# Altium PCB SNES TST Adapter GPM RGB APU.PcbDoc
Units mm, origin at the board's own origin, x right, y up, seen from the top; angles counter-clockwise.
Board outline 18.8 x 25 mm, 4 copper layers (Top Layer, Signal Layer 1, Signal Layer 2, Bottom Layer), stack 0.778 mm thick; 2 components, 68 nets, 280 pads, 150 vias.
Unrouted connection lines stored in the file: 3.
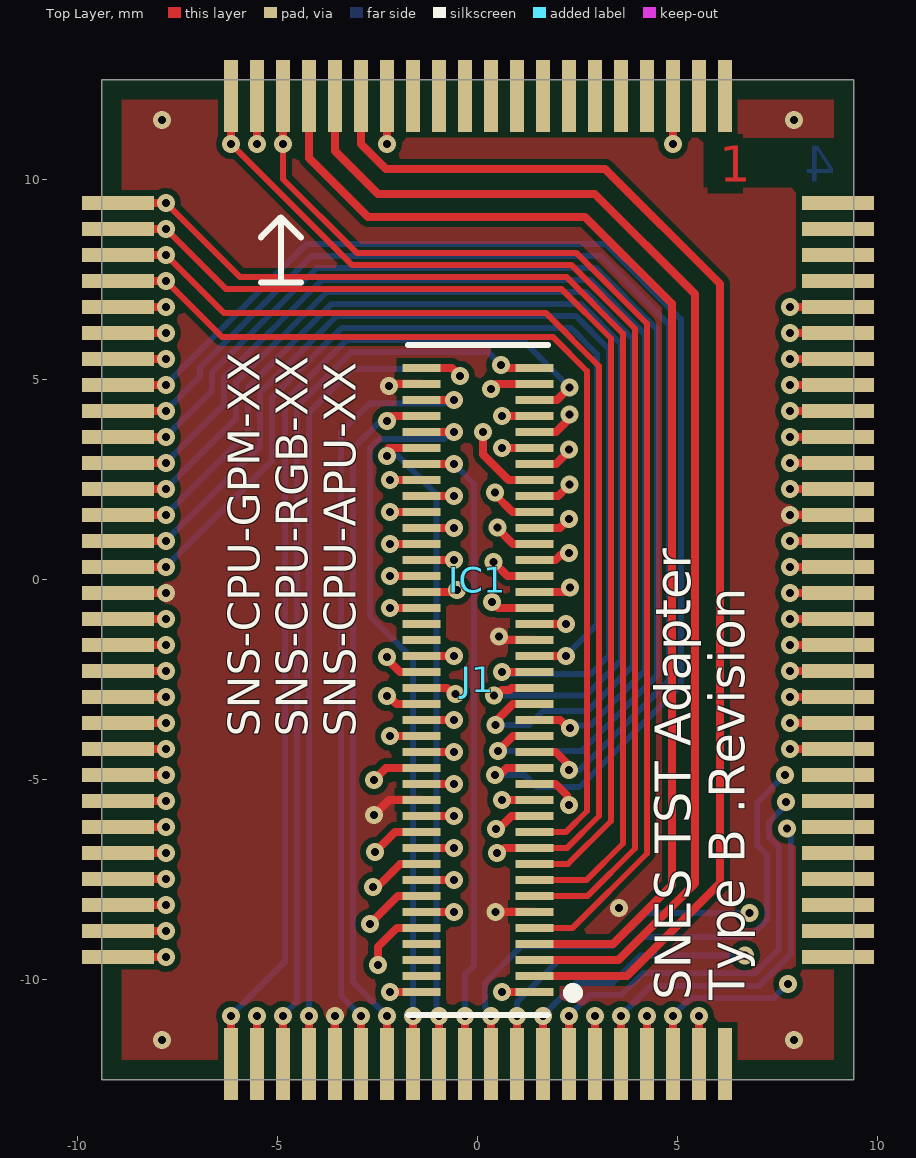
[diagram p0: Top Layer view]
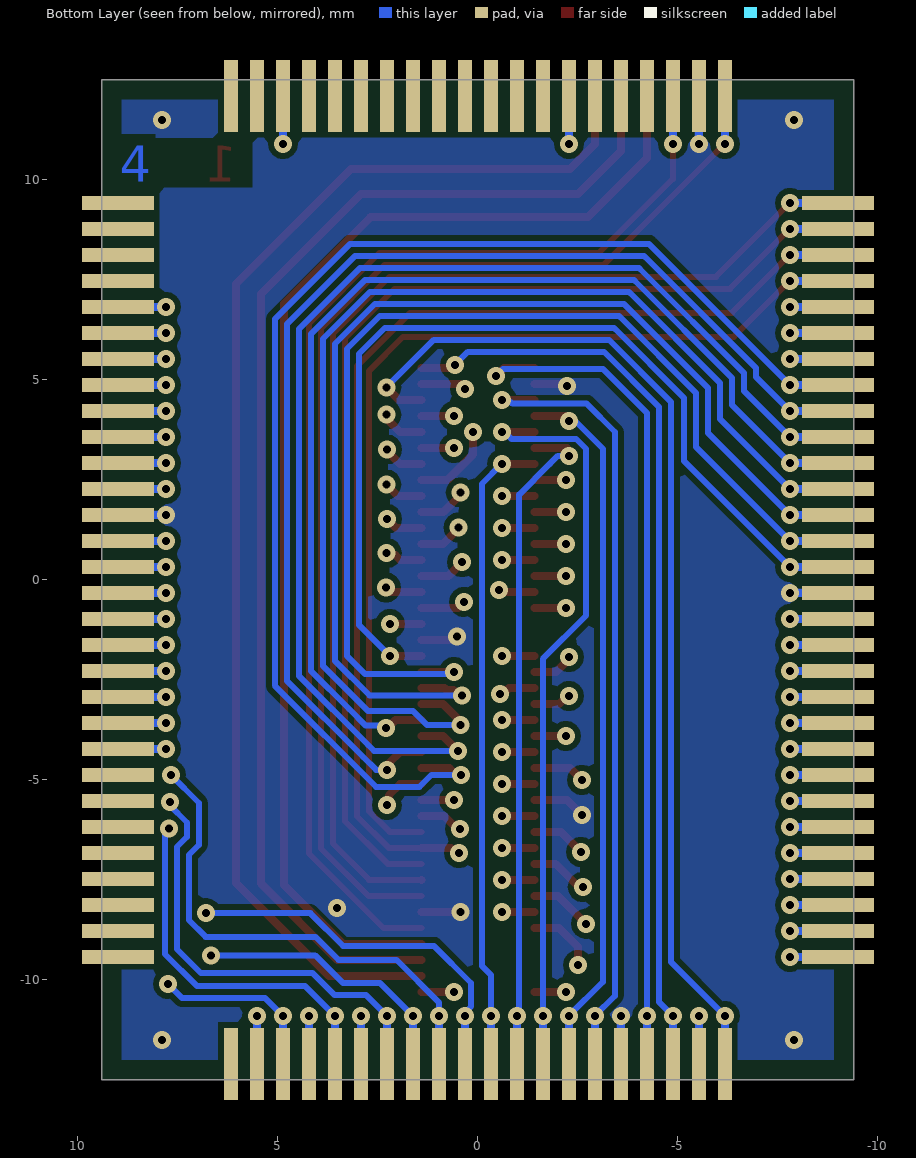
[diagram p1: Bottom Layer view, seen from below]
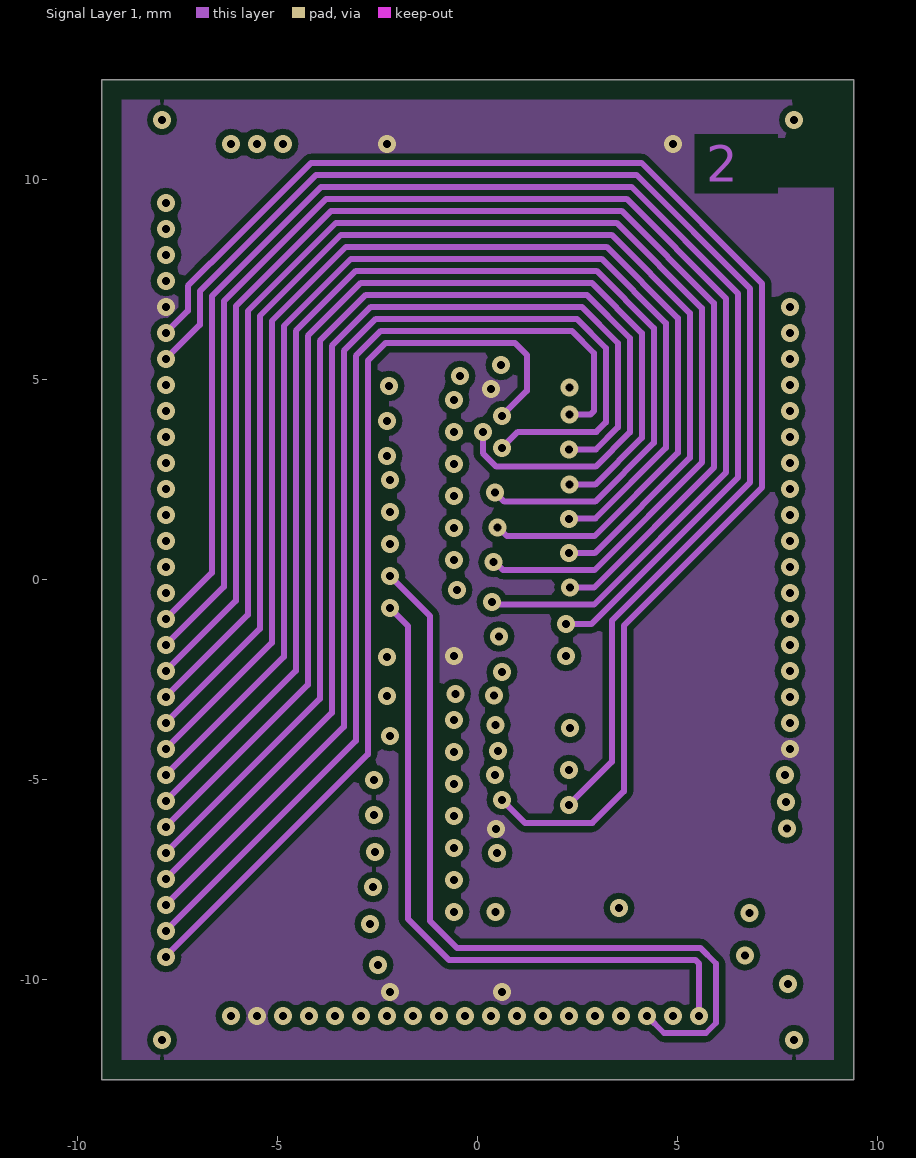
[diagram p2: Signal Layer 1]
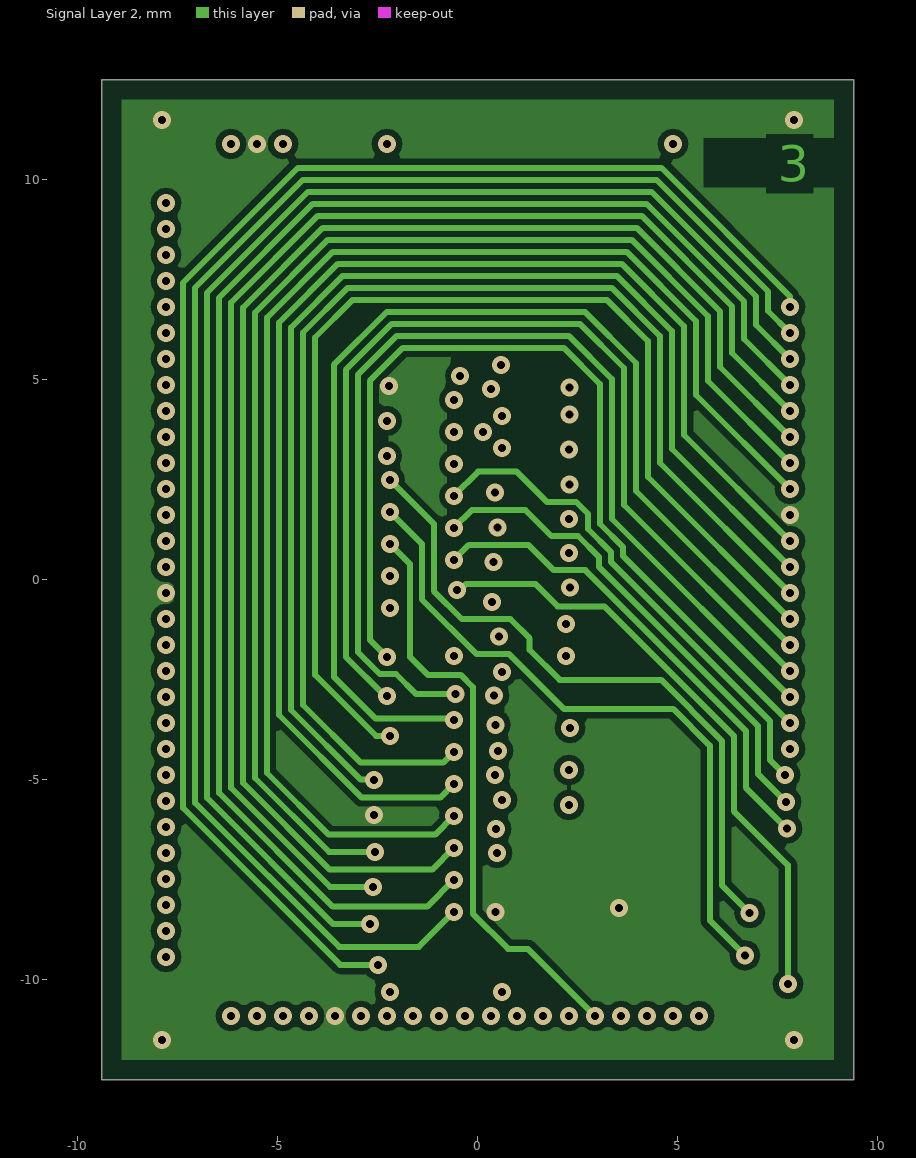
[diagram p3: Signal Layer 2]

## Layer stack, top to bottom
Top Solder: solder mask 0.0102, Solder Resist, Dk 3.5
Top Layer: signal copper 0.0356
Dielectric 1: core 0.254, FR-4, Dk 4.2
Signal Layer 1: signal copper 0.036
Dielectric 3: prepreg 0.127, Dk 4.2
Signal Layer 2: signal copper 0.036
Dielectric 2: core 0.254, Dk 4.2
Bottom Layer: signal copper 0.0356
Bottom Solder: solder mask 0.0102, Solder Resist, Dk 3.5

## Board outline
-9.4,-12.5 9.4,-12.5 9.4,12.5 -9.4,12.5

## Design rules (kind name [scope] priority, off if disabled: settings)
BoardOutlineClearance [All] p1: gap=0 ignorepadtopadclearanceinfootprint=FALSE except(0.25: Track-OutlineEdge Track-CavityEdge Track-CutoutEdge Track-SplitBarrior; 0.3: Poly-OutlineEdge Poly-CavityEdge Poly-CutoutEdge Poly-SplitBarrior)
Clearance [All] p1: gap=0.15 ignorepadtopadclearanceinfootprint=FALSE except(0: Arc-Hole Track-Hole SMDPad-Hole THPad-Hole Via-Hole Fill-Hole Poly-Hole Region-Hole Text-Hole; 0.127: Arc-Via Track-Via)
MinimumSolderMaskSliver [All] p1: minsoldermaskwidth=0.099
PolygonConnect PolygonConnect_Via [isVia] p1: connectstyle=Direct reliefconductorwidth=0.254 reliefentries=4 polygonreliefangle="90 Angle" airgapwidth=0.254
PolygonConnect [All] p2: connectstyle=Relief reliefconductorwidth=0.2 reliefentries=4 polygonreliefangle="90 Angle" airgapwidth=0.2
RoutingVias [All] p1: holewidth=0.711 width=1.27 viastyle="Through Hole" minholewidth=0.2 minwidth=0.35 maxholewidth=0.711 maxwidth=1.27
SilkToSilkClearance [All] p1: silktosilkclearance=0.1
SilkToSolderMaskClearance [IsPad] p1: minsilkscreentomaskgap=0.1 clearancetoexposedcopper=TRUE
SolderMaskExpansion [All] p1: expansion=0.05 istentingtop=FALSE
UnRoutedNet [Not InNet('5V_S')] p1 off:
Width [All] p1: maxlimit=0.75 minlimit=0.15 preferedwidth=0.2
26 further rules are at their usual default settings.

## Components (designator, comment, footprint, x,y, rotation, side; value= is the part's Value field where it differs from the comment)
IC1 "PPU2100Pin" PPU100Pin_Double 0,0 r0 top locked
J1 "Conn 80P" DF40C-80DS 0,-2.5 r90 top locked

## Footprints (in the part's own frame and the unit in brackets; to place one, negate y for a bottom-side part, rotate by r counter-clockwise, add the part's x,y. Pads: shape width x height; smd on the part's side, far side on the other; paste and mask are expansions set on the pad)
DF40C-80DS [mm]
  rect 0.2x0.95 smd: 1(-7.8,-1.415) 2(-7.8,1.415) 3(-7.4,-1.415) 4(-7.4,1.415) 5(-7,-1.415) 6(-7,1.415) 7(-6.6,-1.415) 8(-6.6,1.415) 9(-6.2,-1.415) 10(-6.2,1.415) 11(-5.8,-1.415) 12(-5.8,1.415) 13(-5.4,-1.415) 14(-5.4,1.415) 15(-5,-1.415) 16(-5,1.415) 17(-4.6,-1.415) 18(-4.6,1.415) 19(-4.2,-1.415) 20(-4.2,1.415) 21(-3.8,-1.415) 22(-3.8,1.415) 23(-3.4,-1.415) 24(-3.4,1.415) 25(-3,-1.415) 26(-3,1.415) 27(-2.6,-1.415) 28(-2.6,1.415) 29(-2.2,-1.415) 30(-2.2,1.415) 31(-1.8,-1.415) 32(-1.8,1.415) 33(-1.4,-1.415) 34(-1.4,1.415) 35(-1,-1.415) 36(-1,1.415) 37(-0.6,-1.415) 38(-0.6,1.415) 39(-0.2,-1.415) 40(-0.2,1.415) 41(0.2,-1.415) 42(0.2,1.415) 43(0.6,-1.415) 44(0.6,1.415) 45(1,-1.415) 46(1,1.415) 47(1.4,-1.415) 48(1.4,1.415) 49(1.8,-1.415) 50(1.8,1.415) 51(2.2,-1.415) 52(2.2,1.415) 53(2.6,-1.415) 54(2.6,1.415) 55(3,-1.415) 56(3,1.415) 57(3.4,-1.415) 58(3.4,1.415) 59(3.8,-1.415) 60(3.8,1.415) 61(4.2,-1.415) 62(4.2,1.415) 63(4.6,-1.415) 64(4.6,1.415) 65(5,-1.415) 66(5,1.415) 67(5.4,-1.415) 68(5.4,1.415) 69(5.8,-1.415) 70(5.8,1.415) 71(6.2,-1.415) 72(6.2,1.415) 73(6.6,-1.415) 74(6.6,1.415) 75(7,-1.415) 76(7,1.415) 77(7.4,-1.415) 78(7.4,1.415) 79(7.8,-1.415) 80(7.8,1.415)
  silkscreen extent -8.37,-2.5 8.37,1.75, body extent -9.3,-1.69 9.3,1.69, height 1.4
PPU100Pin_Double [mm]
  rect 1.8x0.35 smd: 1(-9,9.425) 2(-9,8.775) 3(-9,8.125) 4(-9,7.475) 5(-9,6.825) 6(-9,6.175) 7(-9,5.525) 8(-9,4.875) 9(-9,4.225) 10(-9,3.575) 11(-9,2.925) 12(-9,2.275) 13(-9,1.625) 14(-9,0.975) 15(-9,0.325) 16(-9,-0.325) 17(-9,-0.975) 18(-9,-1.625) 19(-9,-2.275) 20(-9,-2.925) 21(-9,-3.575) 22(-9,-4.225) 23(-9,-4.875) 24(-9,-5.525) 25(-9,-6.175) 26(-9,-6.825) 27(-9,-7.475) 28(-9,-8.125) 29(-9,-8.775) 30(-9,-9.425) 51(9,-9.425) 52(9,-8.775) 53(9,-8.125) 54(9,-7.475) 55(9,-6.825) 56(9,-6.175) 57(9,-5.525) 58(9,-4.875) 59(9,-4.225) 60(9,-3.575) 61(9,-2.925) 62(9,-2.275) 63(9,-1.625) 64(9,-0.975) 65(9,-0.325) 66(9,0.325) 67(9,0.975) 68(9,1.625) 69(9,2.275) 70(9,2.925) 71(9,3.575) 72(9,4.225) 73(9,4.875) 74(9,5.525) 75(9,6.175) 76(9,6.825) 77(9,7.475) 78(9,8.125) 79(9,8.775) 80(9,9.425)
  rect 1.8x0.35 smd far side: 1(-9,9.425) 2(-9,8.775) 3(-9,8.125) 4(-9,7.475) 5(-9,6.825) 6(-9,6.175) 7(-9,5.525) 8(-9,4.875) 9(-9,4.225) 10(-9,3.575) 11(-9,2.925) 12(-9,2.275) 13(-9,1.625) 14(-9,0.975) 15(-9,0.325) 16(-9,-0.325) 17(-9,-0.975) 18(-9,-1.625) 19(-9,-2.275) 20(-9,-2.925) 21(-9,-3.575) 22(-9,-4.225) 23(-9,-4.875) 24(-9,-5.525) 25(-9,-6.175) 26(-9,-6.825) 27(-9,-7.475) 28(-9,-8.125) 29(-9,-8.775) 30(-9,-9.425) 51(9,-9.425) 52(9,-8.775) 53(9,-8.125) 54(9,-7.475) 55(9,-6.825) 56(9,-6.175) 57(9,-5.525) 58(9,-4.875) 59(9,-4.225) 60(9,-3.575) 61(9,-2.925) 62(9,-2.275) 63(9,-1.625) 64(9,-0.975) 65(9,-0.325) 66(9,0.325) 67(9,0.975) 68(9,1.625) 69(9,2.275) 70(9,2.925) 71(9,3.575) 72(9,4.225) 73(9,4.875) 74(9,5.525) 75(9,6.175) 76(9,6.825) 77(9,7.475) 78(9,8.125) 79(9,8.775) 80(9,9.425)
  rect 0.35x1.8 smd: 31(-6.175,-12.1) 32(-5.525,-12.1) 33(-4.875,-12.1) 34(-4.225,-12.1) 35(-3.575,-12.1) 36(-2.925,-12.1) 37(-2.275,-12.1) 38(-1.625,-12.1) 39(-0.975,-12.1) 40(-0.325,-12.1) 41(0.325,-12.1) 42(0.975,-12.1) 43(1.625,-12.1) 44(2.275,-12.1) 45(2.925,-12.1) 46(3.575,-12.1) 47(4.225,-12.1) 48(4.875,-12.1) 49(5.525,-12.1) 50(6.175,-12.1) 81(6.175,12.1) 82(5.525,12.1) 83(4.875,12.1) 84(4.225,12.1) 85(3.575,12.1) 86(2.925,12.1) 87(2.275,12.1) 88(1.625,12.1) 89(0.975,12.1) 90(0.325,12.1) 91(-0.325,12.1) 92(-0.975,12.1) 93(-1.625,12.1) 94(-2.275,12.1) 95(-2.925,12.1) 96(-3.575,12.1) 97(-4.225,12.1) 98(-4.875,12.1) 99(-5.525,12.1) 100(-6.175,12.1)
  rect 0.35x1.8 smd far side: 31(-6.175,-12.1) 32(-5.525,-12.1) 33(-4.875,-12.1) 34(-4.225,-12.1) 35(-3.575,-12.1) 36(-2.925,-12.1) 37(-2.275,-12.1) 38(-1.625,-12.1) 39(-0.975,-12.1) 40(-0.325,-12.1) 41(0.325,-12.1) 42(0.975,-12.1) 43(1.625,-12.1) 44(2.275,-12.1) 45(2.925,-12.1) 46(3.575,-12.1) 47(4.225,-12.1) 48(4.875,-12.1) 49(5.525,-12.1) 50(6.175,-12.1) 81(6.175,12.1) 82(5.525,12.1) 83(4.875,12.1) 84(4.225,12.1) 85(3.575,12.1) 86(2.925,12.1) 87(2.275,12.1) 88(1.625,12.1) 89(0.975,12.1) 90(0.325,12.1) 91(-0.325,12.1) 92(-0.975,12.1) 93(-1.625,12.1) 94(-2.275,12.1) 95(-2.925,12.1) 96(-3.575,12.1) 97(-4.225,12.1) 98(-4.875,12.1) 99(-5.525,12.1) 100(-6.175,12.1)

## Part data
IC1: "PPU2"
J1: "80Pole Connector", System=Connector

## Via types
v1: diameter 0.45, hole 0.2, Top Layer to Bottom Layer, tented both sides, 150 vias

## Nets (pads, with @x,y where several pads share a name; then routed paths per layer and width w, separated by ;. In a path a pad name is that pad's centre, name@x,y a point inside that pad or via, vN(x,y) a via of type N, cw(c..) or ccw(c..) an arc to the next point about the centre after c; other vN are vias at no path point)
3.58M: IC1.3 J1.19 | length 28.6
  Top Layer w0.15: v1(-7.8,8.125) -6.35,6.675 1.696,6.675 3.027,5.344 3.027,-5.902 2.229,-6.7 J1.19
  Top Layer w0.2: IC1.3@-9,8.125 v1(-7.8,8.125) ; v1(0.475,-6.825) 0.543,-6.825 0.668,-6.7 J1.19
  Bottom Layer w0.2: IC1.3@-9,8.125 v1(-7.8,8.125)
5MIN: IC1.38 J1.72 | length 20.1
  Top Layer w0.2: IC1.38@-1.625,-12.1 v1(-1.625,-10.9) ; J1.72 v1(-0.6,3.7)
  Bottom Layer w0.15: v1(-1.625,-10.9) -1.625,-1.971 -2.702,-0.894 -2.702,3.277 -2.452,3.527 -0.838,3.527 -0.665,3.7 v1(-0.6,3.7)
  Bottom Layer w0.2: IC1.38@-1.625,-12.1 v1(-1.625,-10.9)
5MOUT: IC1.27 J1.67 | length 29.9
  Top Layer w0.2: IC1.27@-9,-7.475 v1(-7.8,-7.475) ; J1.67 1.95,2.9 v1@2.275,3.225
  Signal Layer 1 w0.15: v1(-7.8,-7.475) -3.65,-3.325 -3.65,5.852 -2.677,6.825 2.598,6.825 3.5,5.923 3.5,3.815 2.946,3.261 v1(2.273,3.261)
  Bottom Layer w0.2: IC1.27@-9,-7.475 v1(-7.8,-7.475)
5V: IC1.5 IC1.32 IC1.59 IC1.83 IC1.94 J1.1 J1.2 J1.23 J1.44 J1.77 | length 16.7
  Top Layer w0.2: IC1.5@-9,6.825 v1(-7.8,6.825) ; IC1.32@-5.525,-12.1 v1(-5.525,-10.9) ; v1(-2.275,10.9) IC1.94@-2.275,12.1 ; v1@-2.23,-10.3 v1(-2.2,-10.3) J1.2 ; J1.44 v1(-0.6,-1.9) ; v1(0.325,4.775) 0.45,4.9 J1.77 ; v1(0.45,-6.225) 0.518,-6.225 0.843,-5.9 J1.23 ; v1(0.6,-10.3) J1.1 ; v1(4.875,10.9) IC1.83@4.875,12.1 ; v1(7.8,-4.225) IC1.59@9,-4.225
  Bottom Layer w0.2: IC1.5@-9,6.825 v1(-7.8,6.825) ; IC1.32@-5.525,-12.1 v1(-5.525,-10.9) ; v1(-2.275,10.9) IC1.94@-2.275,12.1 ; v1(4.875,10.9) IC1.83@4.875,12.1 ; v1(7.8,-4.225) IC1.59@9,-4.225
B: IC1.97 J1.7 | length 30.7
  Top Layer w0.2: IC1.97@-4.225,12.1 -4.225,10.55 -2.75,9.075 2.681,9.075 4.85,6.906 4.85,-7.625 3.375,-9.1 2.2,-9.1 ; J1.7 2.23,-9.1
BURST: IC1.1 J1.15 | length 30.5
  Top Layer w0.15: v1(-7.8,9.425) -5.95,7.575 2.211,7.575 3.627,6.159 3.627,-6.59 2.717,-7.5 J1.15
  Top Layer w0.2: IC1.1@-9,9.425 v1(-7.8,9.425)
  Bottom Layer w0.2: IC1.1@-9,9.425 v1(-7.8,9.425)
CHR0: IC1.46 J1.56 | length 23.5
  Top Layer w0.2: J1.56 v1(-0.6,0.5) ; IC1.46@3.575,-12.1 v1(3.575,-10.9)
  Signal Layer 2 w0.15: v1(-0.6,0.5) -0.225,0.875 1.259,0.875 1.891,0.243 2.684,0.243 6.7,-3.773 6.7,-4.974 6.7,-5.191 v1(7.725,-6.216)
  Bottom Layer w0.15: v1(3.575,-10.9) 4.325,-10.15 7.029,-10.15 7.822,-9.357 7.822,-6.313 v1(7.725,-6.216)
  Bottom Layer w0.2: IC1.46@3.575,-12.1 v1(3.575,-10.9)
CHR1: IC1.47 J1.54 | length 23.3
  Top Layer w0.2: v1@-2.23,0.1 v1(-2.2,0.1) J1.54 ; IC1.47@4.225,-12.1 v1(4.225,-10.9)
  Signal Layer 1 w0.15: v1(-2.2,0.1) -1.2,-0.9 -1.2,-8.525 -0.525,-9.2 5.561,-9.2 5.952,-9.591 5.952,-11.077 5.702,-11.327 4.652,-11.327 v1(4.225,-10.9)
  Bottom Layer w0.2: IC1.47@4.225,-12.1 v1(4.225,-10.9)
CHR2: IC1.48 J1.52 | length 21.8
  Top Layer w0.2: J1.52 -0.575,-0.3 v1(-0.525,-0.25) ; IC1.48@4.875,-12.1 v1(4.875,-10.9)
  Signal Layer 2 w0.15: v1(-0.525,-0.25) -0.444,-0.25 -0.294,-0.1 1.434,-0.1 1.994,-0.66 3.163,-0.66 6.4,-3.897 6.4,-5.779 7.75,-7.129 v1(7.75,-10.1)
  Bottom Layer w0.15: v1(4.875,-10.9) 5.325,-10.45 7.4,-10.45 v1(7.75,-10.1)
  Bottom Layer w0.2: IC1.48@4.875,-12.1 v1(4.875,-10.9)
CHR3: IC1.49 J1.50 | length 20.2
  Top Layer w0.2: v1@-2.23,-0.7 J1.50 ; IC1.49@5.525,-12.1 v1(5.525,-10.9)
  Signal Layer 1 w0.15: v1(-2.2,-0.7) -1.745,-1.155 -1.745,-8.48 -0.725,-9.5 5.437,-9.5 5.525,-9.588 v1(5.525,-10.9)
  Bottom Layer w0.2: IC1.49@5.525,-12.1 v1(5.525,-10.9)
COLOR0: IC1.41 J1.66 | length 28.2
  Top Layer w0.2: v1@-2.23,2.5 J1.66 ; IC1.41@0.325,-12.1 v1(0.325,-10.9)
  Signal Layer 2 w0.15: v1(-2.2,2.5) -1.1,1.4 -1.1,-0.279 -0.402,-0.977 0.81,-0.977 1.293,-1.46 1.293,-1.751 2.042,-2.5 4.579,-2.5 6.1,-4.021 6.1,-7.635 v1(6.795,-8.33)
  Bottom Layer w0.15: v1(0.325,-10.9) 0.325,-10.819 0.173,-10.667 0.173,-10.077 1.1,-9.15 3.372,-9.15 4.191,-8.33 v1(6.795,-8.33)
  Bottom Layer w0.2: IC1.41@0.325,-12.1 v1(0.325,-10.9)
COLOR1: IC1.42 J1.64 | length 27.3
  Top Layer w0.2: J1.64 v1(-0.6,2.1) ; IC1.42@0.975,-12.1 v1(0.975,-10.9)
  Signal Layer 2 w0.15: v1(-0.6,2.1) 0.008,2.708 0.967,2.708 1.723,1.952 2.452,1.952 2.753,1.651 2.753,1.272 3.325,0.7 3.325,0.451 7.3,-3.524 7.3,-4.5 v1(7.675,-4.875)
  Bottom Layer w0.15: v1(0.975,-10.9) 0.975,-10.559 2.034,-9.5 3.486,-9.5 4.061,-8.925 6.804,-8.925 7.222,-8.507 7.222,-6.872 6.973,-6.623 6.973,-5.577 v1(7.675,-4.875)
  Bottom Layer w0.2: IC1.42@0.975,-12.1 v1(0.975,-10.9)
COLOR2: IC1.43 J1.62 | length 25.7
  Top Layer w0.2: v1@-2.23,1.7 v1(-2.2,1.7) J1.62 ; IC1.43@1.625,-12.1 v1(1.625,-10.9)
  Signal Layer 2 w0.15: v1(-2.2,1.7) -1.4,0.9 -1.4,-0.49 -0.04,-1.85 0.775,-1.85 2.15,-3.225 4.879,-3.225 5.8,-4.146 5.8,-8.511 v1(6.673,-9.384)
  Bottom Layer w0.15: v1(1.625,-10.9) 2.45,-10.075 3.378,-10.075 4.069,-9.384 v1(6.673,-9.384)
  Bottom Layer w0.2: IC1.43@1.625,-12.1 v1(1.625,-10.9)
CSYNC: IC1.100 J1.13 | length 30.4
  Top Layer w0.15: v1(-6.175,10.9) -3.15,7.875 2.335,7.875 3.927,6.283 3.927,-6.714 2.741,-7.9 J1.13
  Top Layer w0.2: v1(-6.175,10.9) IC1.100@-6.175,12.1
  Bottom Layer w0.2: v1(-6.175,10.9) IC1.100@-6.175,12.1
D0: IC1.15 J1.43 | length 25.5
  Top Layer w0.2: IC1.15@-9,0.325 v1(-7.8,0.325) ; J1.43 v1@2.23,-1.9
  Bottom Layer w0.15: v1(-7.8,0.325) -5.15,2.975 -5.15,4.551 -3.426,6.275 -3.425,6.275 -3.4,6.3 2.324,6.3 2.975,5.649 2.975,-1.125 v1(2.2,-1.9)
  Bottom Layer w0.2: IC1.15@-9,0.325 v1(-7.8,0.325)
D1: IC1.14 J1.41 | length 28.3
  Top Layer w0.2: IC1.14@-9,0.975 v1(-7.8,0.975) ; v1(0.6,-2.3) J1.41
  Bottom Layer w0.15: v1(-7.8,0.975) -5.45,3.325 -5.45,4.676 -3.551,6.575 -3.549,6.575 -3.524,6.6 2.449,6.6 3.275,5.774 3.275,-1.9 2.818,-2.357 0.657,-2.357 v1(0.6,-2.3)
  Bottom Layer w0.2: IC1.14@-9,0.975 v1(-7.8,0.975)
D2: IC1.13 J1.39 | length 29.6
  Top Layer w0.2: IC1.13@-9,1.625 v1(-7.8,1.625) ; v1(0.403,-2.887) 0.471,-2.887 0.606,-2.752 0.787,-2.752 0.839,-2.7 J1.39
  Bottom Layer w0.15: v1(-7.8,1.625) -5.75,3.675 -5.75,4.8 -3.65,6.9 2.573,6.9 3.575,5.898 3.575,-2.024 2.712,-2.887 v1(0.403,-2.887)
  Bottom Layer w0.2: IC1.13@-9,1.625 v1(-7.8,1.625)
D3: IC1.12 J1.37 | length 30.5
  Top Layer w0.2: IC1.12@-9,2.275 v1(-7.8,2.275) ; v1@0.475,-3.5 0.875,-3.1 J1.37
  Bottom Layer w0.15: v1(-7.8,2.275) -6.05,4.025 -6.05,4.928 -3.804,7.174 -3.8,7.174 -3.774,7.2 2.697,7.2 3.875,6.022 3.875,-2.149 2.751,-3.273 1.627,-3.273 1.278,-3.622 v1(0.434,-3.622)
  Bottom Layer w0.2: IC1.12@-9,2.275 v1(-7.8,2.275)
D4: IC1.11 J1.35 | length 29.1
  Top Layer w0.2: IC1.11@-9,2.925 v1(-7.8,2.925) ; J1.35 2.058,-3.5 2.258,-3.7 v1(2.3,-3.7)
  Bottom Layer w0.15: v1(-7.8,2.925) -6.35,4.375 -6.35,5.052 -3.928,7.474 -3.924,7.474 -3.899,7.5 2.821,7.5 4.175,6.146 4.175,-2.273 3.221,-3.227 2.805,-3.643 2.357,-3.643 v1(2.3,-3.7)
  Bottom Layer w0.2: IC1.11@-9,2.925 v1(-7.8,2.925)
D5: IC1.10 J1.33 | length 31.8
  Top Layer w0.2: IC1.10@-9,3.575 v1(-7.8,3.575) ; v1(0.5,-4.275) 0.875,-3.9 J1.33
  Bottom Layer w0.15: v1(-7.8,3.575) -6.65,4.725 -6.65,5.176 -4.052,7.774 -4.048,7.774 -4.023,7.8 2.946,7.8 4.475,6.271 4.475,-2.397 2.745,-4.127 2.597,-4.275 v1(0.5,-4.275)
  Bottom Layer w0.2: IC1.10@-9,3.575 v1(-7.8,3.575)
D6: IC1.9 J1.31 | length 30.8
  Top Layer w0.2: IC1.9@-9,4.225 v1(-7.8,4.225) ; J1.31 1.944,-4.3 2.227,-4.584 v1@2.227,-4.702
  Bottom Layer w0.15: v1(-7.8,4.225) -6.95,5.075 -6.95,5.301 -4.176,8.075 -4.172,8.075 -4.147,8.1 3.07,8.1 4.775,6.395 4.775,-2.521 2.869,-4.427 2.546,-4.75 v1(2.275,-4.75)
  Bottom Layer w0.2: IC1.9@-9,4.225 v1(-7.8,4.225)
D7: IC1.8 J1.29 | length 33.5
  Top Layer w0.2: IC1.8@-9,4.875 v1(-7.8,4.875) ; v1@0.465,-4.875 0.539,-4.875 0.714,-4.7 J1.29
  Bottom Layer w0.15: v1(-7.8,4.875) -4.3,8.375 -4.296,8.375 -4.271,8.4 3.194,8.4 5.075,6.519 5.075,-2.646 2.543,-5.177 2.272,-5.177 1.463,-5.177 1.161,-4.875 v1(0.425,-4.875)
  Bottom Layer w0.2: IC1.8@-9,4.875 v1(-7.8,4.875)
EXTLATCH: IC1.29 J1.71 | length 28.3
  Top Layer w0.2: IC1.29@-9,-8.775 v1(-7.8,-8.775) ; J1.71 1.95,3.7 v1@2.3,4.05
  Signal Layer 1 w0.15: v1(-7.8,-8.775) -3.05,-4.025 -3.05,5.604 -2.429,6.225 2.349,6.225 2.9,5.674 2.9,4.218 2.812,4.13 v1(2.29,4.13)
  Bottom Layer w0.2: IC1.29@-9,-8.775 v1(-7.8,-8.775)
FIELD: IC1.36 J1.76 | length 21.2
  Top Layer w0.2: IC1.36@-2.925,-12.1 v1(-2.925,-10.9) ; J1.76 v1(-0.6,4.5)
  Bottom Layer w0.15: v1(-2.925,-10.9) -3.427,-10.398 -3.427,3.698 -2.721,4.404 -0.858,4.404 -0.82,4.443 -0.657,4.443 v1(-0.6,4.5)
  Bottom Layer w0.2: IC1.36@-2.925,-12.1 v1(-2.925,-10.9)
G: IC1.96 J1.5 | length 31.4
  Top Layer w0.2: IC1.96@-3.575,12.1 -3.575,10.725 -2.501,9.652 2.92,9.652 5.425,7.146 5.425,-7.59 3.515,-9.5 J1.5
GND: IC1.16 IC1.35 IC1.68 IC1.99 J1.11 J1.26 J1.45 J1.78 | length 13.6
  Top Layer w0.2: IC1.16@-9,-0.325 v1(-7.8,-0.325) ; v1(-5.525,10.9) IC1.99@-5.525,12.1 ; IC1.35@-3.575,-12.1 v1(-3.575,-10.9) ; v1(-2.6,-5.875) -2.225,-5.5 J1.26 ; v1@-2.2,4.9 J1.78 ; v1(0.434,-8.3) J1.11 ; v1(0.524,-1.412) 0.592,-1.412 0.68,-1.5 J1.45 ; v1(7.8,1.625) IC1.68@9,1.625
  Bottom Layer w0.2: IC1.16@-9,-0.325 v1(-7.8,-0.325) ; v1(-5.525,10.9) IC1.99@-5.525,12.1 ; IC1.35@-3.575,-12.1 v1(-3.575,-10.9) ; v1(7.8,1.625) IC1.68@9,1.625
  other v1: -7.9,-11.5 7.9,-11.5 3.525,-8.2 -2.225,4.85 -7.9,11.5 7.9,11.5
HBLANK: IC1.25 J1.63 | length 31.5
  Top Layer w0.2: IC1.25@-9,-6.175 v1(-7.8,-6.175) ; J1.63 2.006,2.1 v1(2.29,2.384)
  Signal Layer 1 w0.15: v1(-7.8,-6.175) -4.25,-2.625 -4.25,6.101 -2.926,7.425 2.846,7.425 4.1,6.171 4.1,3.551 2.933,2.384 v1(2.29,2.384)
  Bottom Layer w0.2: IC1.25@-9,-6.175 v1(-7.8,-6.175)
HCLD: IC1.39 J1.70 | length 17.9
  Top Layer w0.2: v1@-2.23,3.3 J1.70 ; IC1.39@-0.975,-12.1 v1(-0.975,-10.9)
  Bottom Layer w0.15: v1(-2.275,3.1) -2,3.1 -1.8,2.9 -1.032,2.132 -1.032,-10.843 v1(-0.975,-10.9)
  Bottom Layer w0.2: IC1.39@-0.975,-12.1 v1(-0.975,-10.9)
HVC: IC1.98 J1.9 | length 30.7
  Top Layer w0.15: v1(-4.875,10.9) -4.875,10.024 -3.026,8.175 2.459,8.175 4.227,6.407 4.227,-6.839 2.36,-8.706 1.421,-8.706 J1.9
  Top Layer w0.2: v1(-4.875,10.9) IC1.98@-4.875,12.1
  Bottom Layer w0.2: v1(-4.875,10.9) IC1.98@-4.875,12.1
OVER1: IC1.37 J1.74 | length 18.9
  Top Layer w0.2: IC1.37@-2.275,-12.1 v1(-2.275,-10.9) ; v1@-2.23,4.1 J1.74
  Bottom Layer w0.15: v1(-2.275,-10.9) -3.127,-10.048 -3.127,3.276 -2.428,3.975 v1(-2.275,3.975)
  Bottom Layer w0.2: IC1.37@-2.275,-12.1 v1(-2.275,-10.9)
PA0: IC1.24 J1.61 | length 34.4
  Top Layer w0.2: IC1.24@-9,-5.525 v1(-7.8,-5.525) ; v1(0.431,2.187) 0.431,2.131 0.863,1.7 J1.61
  Signal Layer 1 w0.15: v1(-7.8,-5.525) -4.55,-2.275 -4.55,6.225 -3.05,7.725 2.971,7.725 4.4,6.296 4.4,3.426 2.93,1.957 0.662,1.957 v1(0.431,2.187)
  Bottom Layer w0.2: IC1.24@-9,-5.525 v1(-7.8,-5.525)
PA1: IC1.23 J1.59 | length 33
  Top Layer w0.2: IC1.23@-9,-4.875 v1(-7.8,-4.875) ; J1.59 2.05,1.3 v1(2.275,1.525)
  Signal Layer 1 w0.15: v1(-7.8,-4.875) -4.85,-1.925 -4.85,6.349 -3.174,8.025 3.095,8.025 4.7,6.42 4.7,3.302 2.934,1.536 2.462,1.536 2.451,1.525 v1(2.275,1.525)
  Bottom Layer w0.2: IC1.23@-9,-4.875 v1(-7.8,-4.875)
PA2: IC1.22 J1.57 | length 35.8
  Top Layer w0.2: IC1.22@-9,-4.225 v1(-7.8,-4.225) ; v1@0.475,1.3 0.875,0.9 J1.57
  Signal Layer 1 w0.15: v1(-7.8,-4.225) -5.15,-1.575 -5.15,6.474 -3.299,8.325 3.219,8.325 5,6.544 5,3.178 2.92,1.098 0.725,1.098 0.514,1.309 v1(0.487,1.309)
  Bottom Layer w0.2: IC1.22@-9,-4.225 v1(-7.8,-4.225)
PA3: IC1.21 J1.55 | length 34.5
  Top Layer w0.2: IC1.21@-9,-3.575 v1(-7.8,-3.575) ; J1.55 1.944,0.5 2.066,0.622 2.232,0.622 v1(2.28,0.67)
  Signal Layer 1 w0.15: v1(-7.8,-3.575) -5.45,-1.225 -5.45,6.598 -3.423,8.625 3.343,8.625 5.3,6.668 5.3,3.054 2.916,0.67 v1(2.28,0.67)
  Bottom Layer w0.2: IC1.21@-9,-3.575 v1(-7.8,-3.575)
PA4: IC1.20 J1.53 | length 37.5
  Top Layer w0.2: IC1.20@-9,-2.925 v1(-7.8,-2.925) ; v1(0.395,0.444) 0.739,0.1 J1.53
  Signal Layer 1 w0.15: v1(-7.8,-2.925) -5.75,-0.875 -5.75,6.722 -3.547,8.925 3.468,8.925 5.6,6.793 5.6,2.929 2.914,0.243 0.633,0.243 0.432,0.444 v1(0.395,0.444)
  Bottom Layer w0.2: IC1.20@-9,-2.925 v1(-7.8,-2.925)
PA5: IC1.19 J1.51 | length 36
  Top Layer w0.2: IC1.19@-9,-2.275 v1(-7.8,-2.275) ; J1.51 2.185,-0.3 v1(2.296,-0.189)
  Signal Layer 1 w0.15: v1(-7.8,-2.275) -6.05,-0.525 -6.05,6.846 -3.671,9.225 3.592,9.225 5.9,6.917 5.9,2.805 2.906,-0.189 v1(2.296,-0.189)
  Bottom Layer w0.2: IC1.19@-9,-2.275 v1(-7.8,-2.275)
PA6: IC1.18 J1.49 | length 39
  Top Layer w0.2: IC1.18@-9,-1.625 v1(-7.8,-1.625) ; v1(0.35,-0.55) 0.5,-0.7 J1.49
  Signal Layer 1 w0.15: v1(-7.8,-1.625) -6.35,-0.175 -6.35,6.971 -3.796,9.525 3.716,9.525 6.2,7.041 6.2,2.681 2.903,-0.616 0.403,-0.616 v1@0.327,-0.692
  Bottom Layer w0.2: IC1.18@-9,-1.625 v1(-7.8,-1.625)
PA7: IC1.17 J1.47 | length 37.6
  Top Layer w0.2: IC1.17@-9,-0.975 v1(-7.8,-0.975) ; J1.47 v1@2.23,-1.1
  Signal Layer 1 w0.15: v1(-7.8,-0.975) -6.65,0.175 -6.65,7.095 -3.92,9.825 3.84,9.825 6.5,7.165 6.5,2.557 2.843,-1.1 v1(2.2,-1.1)
  Bottom Layer w0.2: IC1.17@-9,-0.975 v1(-7.8,-0.975)
PALMODE: IC1.30 J1.73 | length 26.3
  Top Layer w0.2: IC1.30@-9,-9.425 v1(-7.8,-9.425) ; v1(0.6,4.1) J1.73
  Signal Layer 1 w0.15: v1(-7.8,-9.425) -7.8,-9.413 -2.75,-4.363 -2.75,5.479 -2.304,5.925 0.925,5.925 1.225,5.625 1.225,4.725 v1(0.6,4.1)
  Bottom Layer w0.2: IC1.30@-9,-9.425 v1(-7.8,-9.425)
PARD: IC1.7 J1.27 | length 36.6
  Top Layer w0.2: IC1.7@-9,5.525 v1(-7.8,5.525) ; J1.27 1.944,-5.1 2.227,-5.384 2.227,-5.577 v1(2.275,-5.625)
  Signal Layer 1 w0.15: v1(-7.8,5.525) -6.95,6.375 -6.95,7.219 -4.044,10.125 3.965,10.125 6.8,7.29 6.8,2.432 3.35,-1.018 3.35,-4.55 v1(2.275,-5.625)
  Bottom Layer w0.2: IC1.7@-9,5.525 v1(-7.8,5.525)
PAWR: IC1.6 J1.25 | length 39.2
  Top Layer w0.2: IC1.6@-9,6.175 v1(-7.8,6.175) ; v1(0.6,-5.5) J1.25
  Signal Layer 1 w0.15: v1(-7.8,6.175) -7.25,6.725 -7.25,7.35 -6.675,7.925 -6.668,7.925 -4.168,10.425 4.089,10.425 7.1,7.414 7.1,2.308 3.65,-1.142 3.65,-5.287 2.862,-6.075 1.175,-6.075 v1(0.6,-5.5)
  Bottom Layer w0.2: IC1.6@-9,6.175 v1(-7.8,6.175)
PED: IC1.2 J1.17 | length 29.1
  Top Layer w0.15: v1(-7.8,8.775) -6.3,7.275 2.086,7.275 3.327,6.034 3.327,-6.026 2.253,-7.1 J1.17
  Top Layer w0.2: IC1.2@-9,8.775 v1(-7.8,8.775)
  Bottom Layer w0.2: IC1.2@-9,8.775 v1(-7.8,8.775)
PRIO0: IC1.44 J1.60 | length 25.5
  Top Layer w0.2: J1.60 v1(-0.6,1.3) ; IC1.44@2.275,-12.1 v1(2.275,-10.9)
  Signal Layer 2 w0.15: v1(-0.6,1.3) -0.154,1.746 1.188,1.746 1.836,1.098 2.098,1.098 2.502,1.098 3.025,0.575 3.025,0.326 7,-3.649 7,-4.85 v1(7.7,-5.55)
  Bottom Layer w0.15: v1(2.275,-10.9) 2.8,-10.375 3.589,-10.375 4.134,-9.831 6.924,-9.831 7.522,-9.232 7.522,-6.672 7.273,-6.423 7.273,-6.064 7.7,-5.637 v1(7.7,-5.55)
  Bottom Layer w0.2: IC1.44@2.275,-12.1 v1(2.275,-10.9)
PRIO1: IC1.45 J1.58 | length 17.9
  Top Layer w0.2: v1(-2.2,0.9) J1.58 ; IC1.45@2.925,-12.1 v1(2.925,-10.9)
  Signal Layer 2 w0.15: v1(-2.2,0.9) -1.7,0.4 -1.7,-1.925 -1.253,-2.372 -0.431,-2.372 -0.127,-2.677 -0.127,-8.343 0.755,-9.225 1.25,-9.225 v1(2.925,-10.9)
  Bottom Layer w0.2: IC1.45@2.925,-12.1 v1(2.925,-10.9)
R: IC1.95 J1.3 | length 32.2
  Top Layer w0.2: IC1.95@-2.925,12.1 -2.925,10.9 -2.302,10.277 3.175,10.277 6.05,7.402 6.05,-7.575 3.725,-9.9 2.2,-9.9 ; J1.3 2.23,-9.9
RESET: IC1.34 J1.80 | length 22.8
  Top Layer w0.2: IC1.34@-4.225,-12.1 v1(-4.225,-10.9) ; J1.80 -0.65,5.3 v1(-0.45,5.1)
  Bottom Layer w0.15: v1(-4.225,-10.9) -4.225,4.176 -3.124,5.277 -0.627,5.277 v1(-0.45,5.1)
  Bottom Layer w0.2: IC1.34@-4.225,-12.1 v1(-4.225,-10.9)
RESOUT0: IC1.33 J1.79 | length 24.4
  Top Layer w0.2: IC1.33@-4.875,-12.1 v1(-4.875,-10.9) ; v1(0.575,5.375) 0.656,5.375 0.731,5.3 J1.79
  Bottom Layer w0.15: v1(-4.875,-10.9) -4.525,-10.55 -4.525,4.326 -3.151,5.7 0.25,5.7 v1(0.575,5.375)
  Bottom Layer w0.2: IC1.33@-4.875,-12.1 v1(-4.875,-10.9)
RESOUT1: IC1.28 J1.69 | length 30.8
  Top Layer w0.2: IC1.28@-9,-8.125 v1(-7.8,-8.125) ; v1(0.6,3.3) J1.69
  Signal Layer 1 w0.15: v1(-7.8,-8.125) -3.35,-3.675 -3.35,5.728 -2.553,6.525 2.474,6.525 3.2,5.799 3.2,3.939 2.961,3.7 1,3.7 v1(0.6,3.3)
  Bottom Layer w0.2: IC1.28@-9,-8.125 v1(-7.8,-8.125)
TOUMEI: IC1.4 J1.21 | length 26.4
  Top Layer w0.15: v1(-7.8,7.475) -6.4,6.075 1.872,6.075 2.727,5.22 2.727,-5.777 2.204,-6.3 J1.21
  Top Layer w0.2: IC1.4@-9,7.475 v1(-7.8,7.475)
  Bottom Layer w0.2: IC1.4@-9,7.475 v1(-7.8,7.475)
VBLANK: IC1.26 J1.65 | length 34.6
  Top Layer w0.2: IC1.26@-9,-6.825 v1(-7.8,-6.825) ; v1(0.125,3.7) 0.125,3.136 0.761,2.5 J1.65
  Signal Layer 1 w0.15: v1(-7.8,-6.825) -3.95,-2.975 -3.95,5.976 -2.801,7.125 2.722,7.125 3.8,6.047 3.8,3.691 2.943,2.834 0.462,2.834 0.125,3.171 v1(0.125,3.7)
  Bottom Layer w0.2: IC1.26@-9,-6.825 v1(-7.8,-6.825)
VCLD: IC1.40 J1.68 | length 17.3
  Top Layer w0.2: J1.68 v1(-0.6,2.9) ; IC1.40@-0.325,-12.1 v1(-0.325,-10.9)
  Bottom Layer w0.15: v1(-0.6,2.9) -0.098,2.398 -0.098,-9.648 -0.325,-9.875 v1(-0.325,-10.9)
  Bottom Layer w0.2: IC1.40@-0.325,-12.1 v1(-0.325,-10.9)
VDA0: IC1.60 J1.42 | length 27.4
  Top Layer w0.2: v1@-2.275,-1.975 -1.95,-2.3 J1.42 ; v1(7.8,-3.575) IC1.60@9,-3.575
  Signal Layer 2 w0.15: v1(-2.275,-1.925) -2.702,-1.498 -2.702,4.977 -1.877,5.802 2.145,5.802 3.053,4.894 3.053,1.397 3.625,0.825 3.625,0.6 v1(7.8,-3.575)
  Bottom Layer w0.2: v1(7.8,-3.575) IC1.60@9,-3.575
VDA1: IC1.61 J1.40 | length 30.1
  Top Layer w0.2: J1.40 -0.775,-2.7 -0.625,-2.85 v1(-0.557,-2.85) ; v1(7.8,-2.925) IC1.61@9,-2.925
  Signal Layer 2 w0.15: v1(-0.557,-2.85) -1.55,-2.85 -2.048,-2.352 -2.452,-2.352 -3.002,-1.802 -3.002,5.126 -2.026,6.102 2.269,6.102 3.353,5.018 3.353,1.522 v1(7.8,-2.925)
  Bottom Layer w0.2: v1(7.8,-2.925) IC1.61@9,-2.925
VDA2: IC1.62 J1.38 | length 29.1
  Top Layer w0.2: v1(-2.275,-2.9) -2.233,-2.9 -2.033,-3.1 J1.38 ; v1(7.8,-2.275) IC1.62@9,-2.275
  Signal Layer 2 w0.15: v1(-2.275,-2.9) -2.328,-2.9 -3.302,-1.926 -3.302,5.25 -2.15,6.402 2.55,6.402 3.653,5.299 3.653,1.872 v1(7.8,-2.275)
  Bottom Layer w0.2: v1(7.8,-2.275) IC1.62@9,-2.275
VDA3: IC1.63 J1.36 | length 31.7
  Top Layer w0.2: J1.36 v1(-0.6,-3.5) ; v1(7.8,-1.625) IC1.63@9,-1.625
  Signal Layer 2 w0.15: v1(-0.6,-3.5) -0.639,-3.461 -2.563,-3.461 -3.602,-2.421 -3.602,5.375 -2.274,6.702 2.674,6.702 3.953,5.424 3.953,2.222 v1(7.8,-1.625)
  Bottom Layer w0.2: v1(7.8,-1.625) IC1.63@9,-1.625
VDA4: IC1.64 J1.34 | length 31.7
  Top Layer w0.2: v1@-2.23,-3.9 J1.34 ; v1(7.8,-0.975) IC1.64@9,-0.975
  Signal Layer 2 w0.15: v1(-2.2,-3.9) -2.548,-3.9 -4.073,-2.375 -4.073,6.06 -3.131,7.002 3.221,7.002 4.253,5.97 4.253,2.572 v1(7.8,-0.975)
  Bottom Layer w0.2: v1(7.8,-0.975) IC1.64@9,-0.975
VDA5: IC1.65 J1.32 | length 34.7
  Top Layer w0.2: J1.32 v1(-0.6,-4.3) ; v1(7.8,-0.325) IC1.65@9,-0.325
  Signal Layer 2 w0.15: v1(-0.6,-4.3) -0.87,-4.57 -2.93,-4.57 -4.373,-3.127 -4.373,6.184 -3.255,7.302 3.346,7.302 4.553,6.095 4.553,2.922 v1(7.8,-0.325)
  Bottom Layer w0.2: v1(7.8,-0.325) IC1.65@9,-0.325
VDA6: IC1.66 J1.30 | length 33.8
  Top Layer w0.2: v1(-2.6,-5) -2.3,-4.7 J1.30 ; v1(7.8,0.325) IC1.66@9,0.325
  Signal Layer 2 w0.15: v1(-2.6,-5) -2.606,-4.995 -2.931,-4.995 -4.673,-3.253 -4.673,6.309 -3.379,7.602 3.47,7.602 4.853,6.219 4.853,3.272 v1(7.8,0.325)
  Bottom Layer w0.2: v1(7.8,0.325) IC1.66@9,0.325
VDA7: IC1.67 J1.28 | length 36.2
  Top Layer w0.2: J1.28 v1(-0.6,-5.1) ; v1(7.8,0.975) IC1.67@9,0.975
  Signal Layer 2 w0.15: v1(-0.6,-5.1) -0.944,-5.444 -2.906,-5.444 -4.973,-3.377 -4.973,6.433 -3.504,7.902 3.594,7.902 5.153,6.343 5.153,3.622 v1(7.8,0.975)
  Bottom Layer w0.2: v1(7.8,0.975) IC1.67@9,0.975
VDB0: IC1.69 J1.24 | length 37.4
  Top Layer w0.2: J1.24 v1(-0.6,-5.9) ; v1(7.8,2.275) IC1.69@9,2.275
  Signal Layer 2 w0.15: v1(-0.6,-5.9) -1.07,-6.37 -3.73,-6.37 -5.273,-4.827 -5.273,6.557 -3.628,8.202 3.718,8.202 5.453,6.468 5.453,4.622 v1(7.8,2.275)
  Bottom Layer w0.2: v1(7.8,2.275) IC1.69@9,2.275
VDB1: IC1.70 J1.22 | length 36.6
  Top Layer w0.2: v1(-2.575,-6.8) -2.075,-6.3 J1.22 ; v1(7.8,2.925) IC1.70@9,2.925
  Signal Layer 2 w0.15: v1(-2.575,-6.8) -3.724,-6.8 -5.573,-4.951 -5.573,6.681 -3.752,8.502 3.843,8.502 5.753,6.592 5.753,4.972 v1(7.8,2.925)
  Bottom Layer w0.2: v1(7.8,2.925) IC1.70@9,2.925
VDB2: IC1.71 J1.20 | length 39
  Top Layer w0.2: J1.20 v1(-0.6,-6.7) ; v1(7.8,3.575) IC1.71@9,3.575
  Signal Layer 2 w0.15: v1(-0.6,-6.7) -1.143,-7.243 -3.706,-7.243 -5.873,-5.076 -5.873,6.806 -3.876,8.802 3.967,8.802 6.053,6.716 6.053,5.322 v1(7.8,3.575)
  Bottom Layer w0.2: v1(7.8,3.575) IC1.71@9,3.575
VDB3: IC1.72 J1.18 | length 38.1
  Top Layer w0.2: v1(-2.622,-7.675) -2.519,-7.675 -1.944,-7.1 J1.18 ; v1(7.8,4.225) IC1.72@9,4.225
  Signal Layer 2 w0.15: v1(-2.622,-7.675) -3.698,-7.675 -6.173,-5.2 -6.173,6.93 -4.001,9.102 4.091,9.102 6.353,6.84 6.353,5.672 v1(7.8,4.225)
  Bottom Layer w0.2: v1(7.8,4.225) IC1.72@9,4.225
VDB4: IC1.73 J1.16 | length 40.6
  Top Layer w0.2: J1.16 v1(-0.6,-7.5) ; v1(7.8,4.875) IC1.73@9,4.875
  Signal Layer 2 w0.15: v1(-0.6,-7.5) -1.27,-8.17 -3.627,-8.17 -6.473,-5.324 -6.473,7.054 -4.125,9.402 4.215,9.402 6.653,6.965 6.653,6.022 v1(7.8,4.875)
  Bottom Layer w0.2: v1(7.8,4.875) IC1.73@9,4.875
VDB5: IC1.74 J1.14 | length 39.7
  Top Layer w0.2: v1(-2.7,-8.597) -2.003,-7.9 J1.14 ; v1(7.8,5.525) IC1.74@9,5.525
  Signal Layer 2 w0.15: v1(-2.7,-8.597) -3.625,-8.597 -6.773,-5.448 -6.773,7.178 -4.249,9.702 4.34,9.702 6.953,7.089 6.953,6.372 v1(7.8,5.525)
  Bottom Layer w0.2: v1(7.8,5.525) IC1.74@9,5.525
VDB6: IC1.75 J1.12 | length 42.3
  Top Layer w0.2: J1.12 v1(-0.6,-8.3) ; v1(7.8,6.175) IC1.75@9,6.175
  Signal Layer 2 w0.15: v1(-0.6,-8.3) -1.475,-9.175 -3.471,-9.175 -7.073,-5.573 -7.073,7.303 -4.373,10.002 4.464,10.002 7.253,7.213 7.253,6.722 v1(7.8,6.175)
  Bottom Layer w0.2: v1(7.8,6.175) IC1.75@9.024,6.175
VDB7: IC1.76 J1.10 | length 41.7
  Top Layer w0.2: v1(-2.5,-9.625) -2.5,-9.171 -2.029,-8.7 J1.10 ; v1(7.8,6.825) IC1.76@9,6.825
  Signal Layer 2 w0.15: v1(-2.5,-9.625) -3.445,-9.625 -7.373,-5.697 -7.373,7.427 -4.498,10.302 4.588,10.302 7.8,7.09 v1(7.8,6.825)
  Bottom Layer w0.2: v1(7.8,6.825) IC1.76@9,6.825
XIN: IC1.31 J1.75 | length 27.6
  Top Layer w0.2: IC1.31@-6.175,-12.1 v1(-6.175,-10.9) ; J1.75 1.975,4.5 v1(2.29,4.815)
  Bottom Layer w0.15: v1(-6.175,-10.9) -4.825,-9.55 -4.825,4.451 -3.276,6 1.104,6 v1(2.29,4.815)
  Bottom Layer w0.2: IC1.31@-6.175,-12.1 v1(-6.175,-10.9)
pads on no net: IC1.50 IC1.51 IC1.52 IC1.53 IC1.54 IC1.55 IC1.56 IC1.57 IC1.58 IC1.77 IC1.78 IC1.79 IC1.80 IC1.81 IC1.82 IC1.84 IC1.85 IC1.86 IC1.87 IC1.88 IC1.89 IC1.90 IC1.91 IC1.92 IC1.93 J1.4 J1.6 J1.8 J1.46 J1.48

## Polygon pours and split planes (outlines as drawn)
GND on Bottom Layer "GND BOT" (solid, remove dead copper, pour order 0): -8.9,-12 8.9,-12 8.9,12 -8.9,12
GND on Signal Layer 2 "GND Sig2" (solid, remove dead copper, pour order 2): -8.9,-12 8.9,-12 8.9,12 -8.9,12
GND on Top Layer "GND TOP" (solid, remove dead copper, pour order 4): -8.9,-12 8.9,-12 8.9,12 -8.9,12
5V on Signal Layer 1 "5V" (solid, remove dead copper, pour order 5): -8.9,-12 8.9,-12 8.9,12 -8.9,12

## Other copper
Top Layer:
  text "1" at 6.032,9.951 h0.9
Signal Layer 1:
  text "2" at 5.707,9.951 h0.9
Signal Layer 2:
  text "3" at 7.5,9.95 h0.9
Bottom Layer:
  text "4" at 8.95,9.95 h0.9
Multi-Layer:
  pour cut-out: 5.628,9.8 5.628,11.05 9.15,11.05 9.15,9.8

## Silkscreen, mask and mechanical layers (free items; w line width, h text height)
Top Overlay:
  lines w0.15: -5.425,7.437 -4.425,7.437 ; -5.425,8.563 -4.925,9.062 ; -4.925,7.437 -4.925,9.062 ; -4.425,8.563 -4.925,9.062
  text "SNS-CPU-GPM-XX / SNS-CPU-RGB-XX / SNS-CPU-APU-XX" at -3.05,-3.925 h0.8 r90
  text "SNES TST Adapter / Type B .Revision" at 6.675,-10.513 h0.9 r90
Mechanical 3:
  the board outline again, w0.05